# Altium PCB AgulhasCPU25.PCBDOC (part 1 of 10)
Units mm, origin at the board's own origin, x right, y up, seen from the top; angles counter-clockwise.
Board outline 179.96 x 114.94 mm, 2 copper layers (Top Layer, Top, Bottom Layer, Bottom), stack 1.341 mm thick; 247 components, 222 nets, 910 pads, 491 vias.
Unrouted connection lines stored in the file: 2.
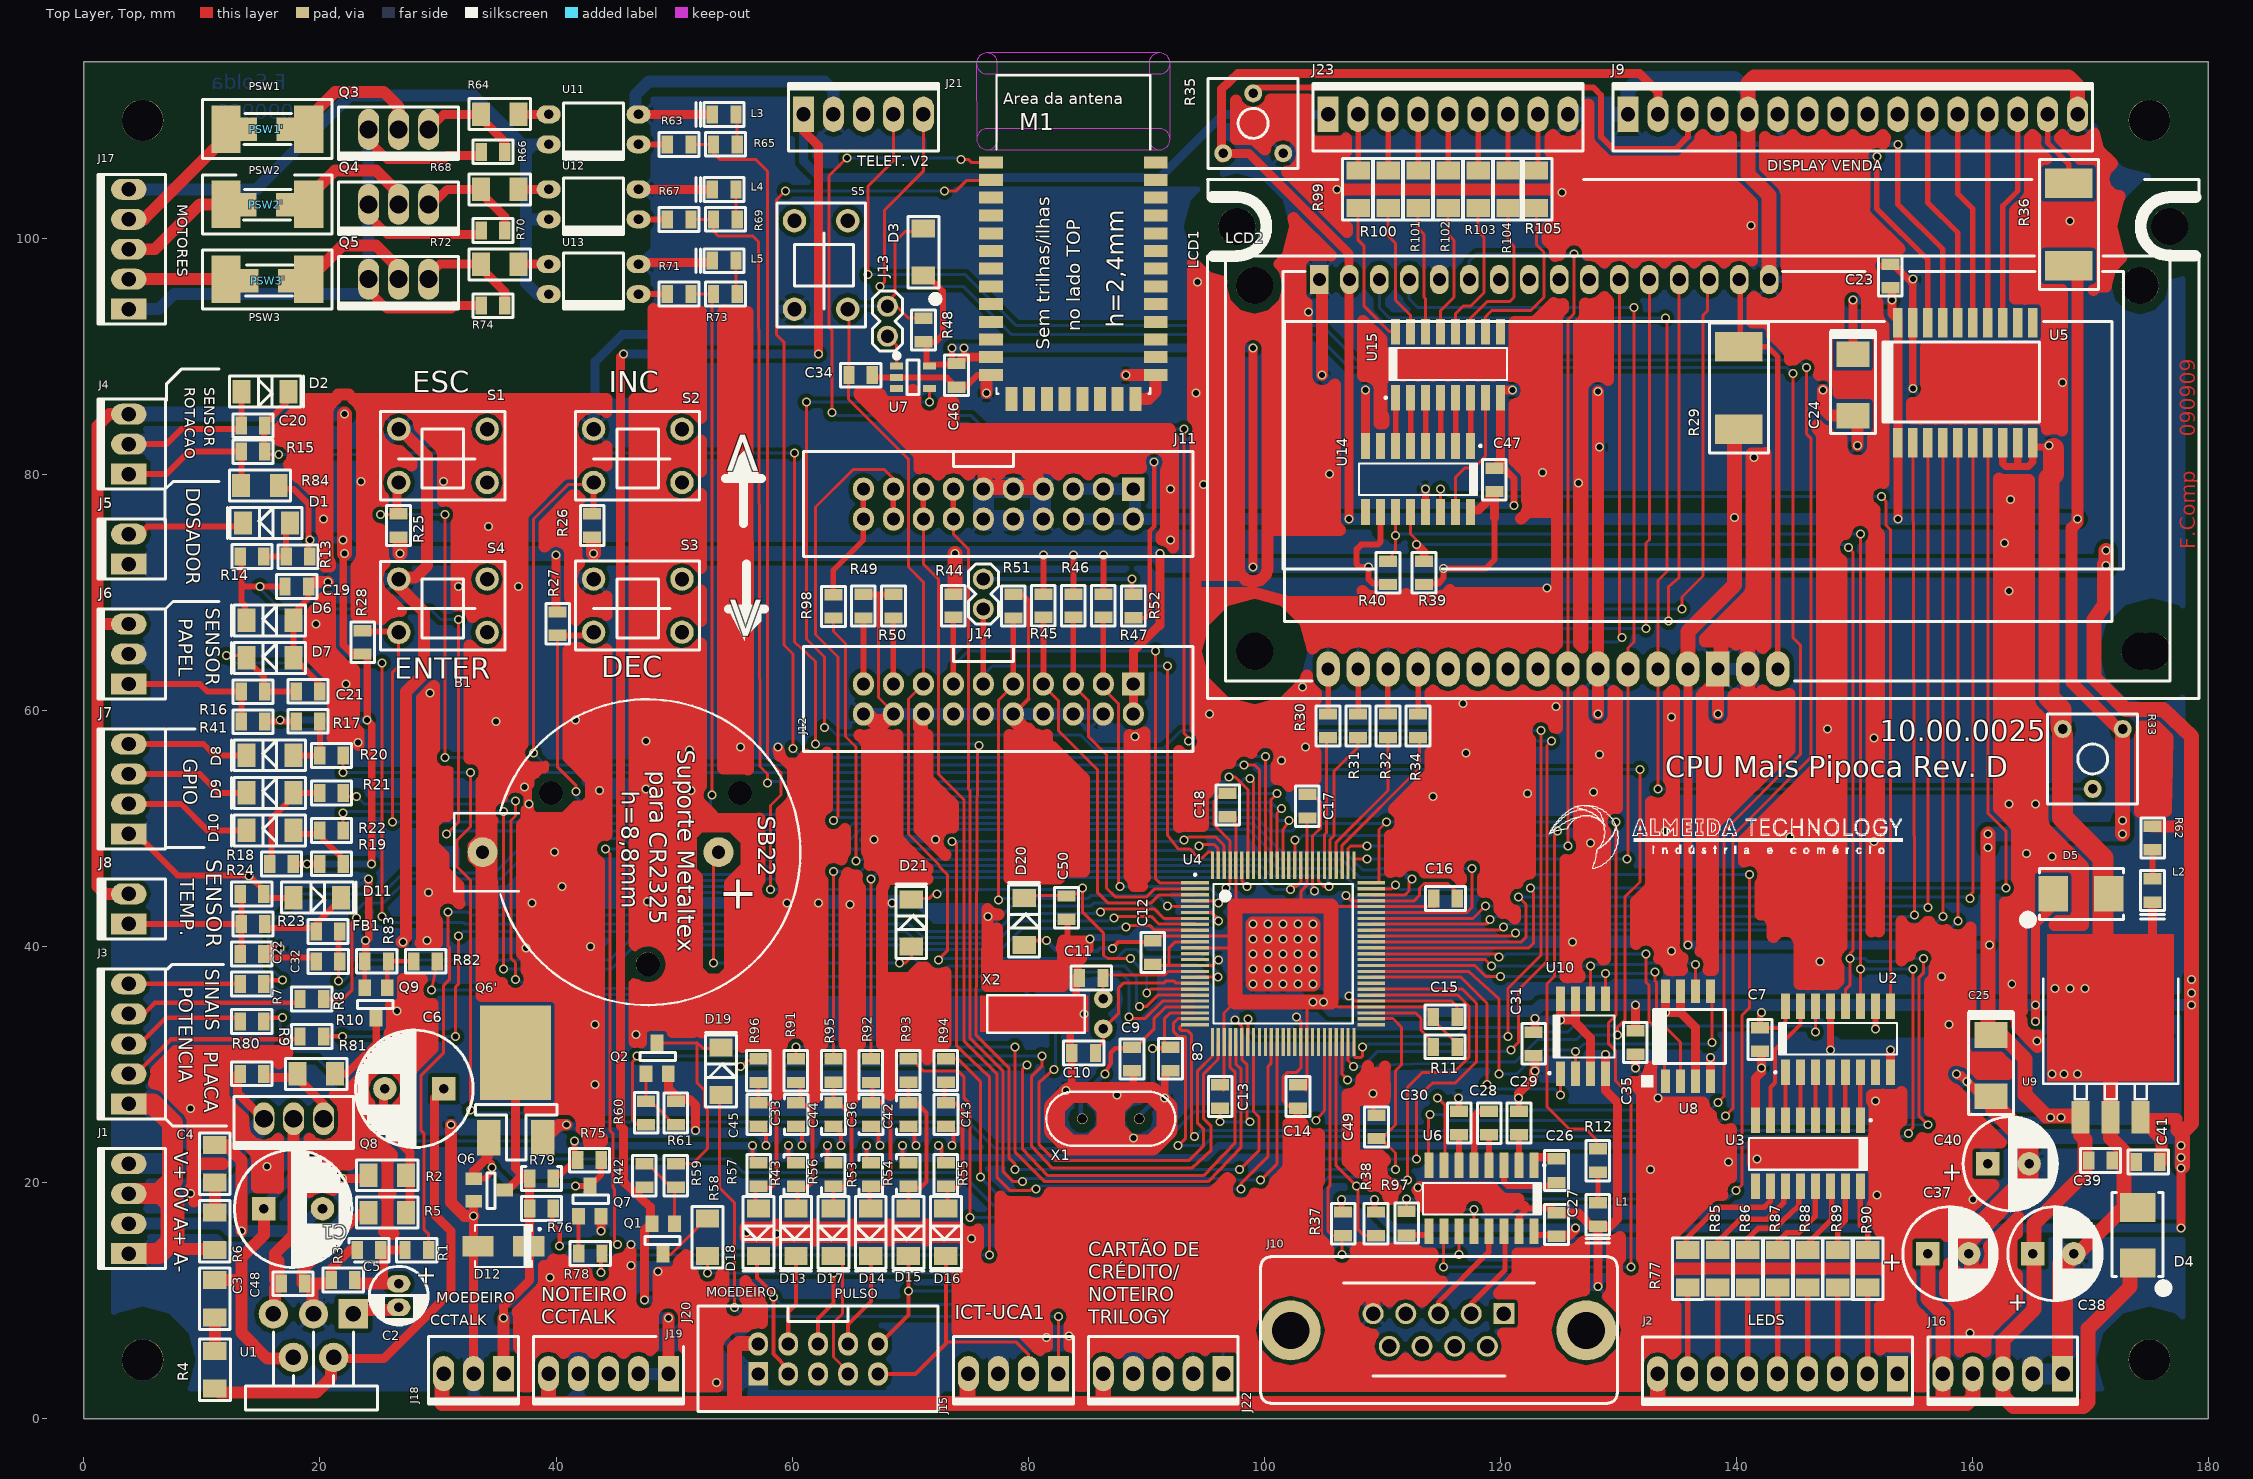
[diagram p0: Top Layer, Top view]
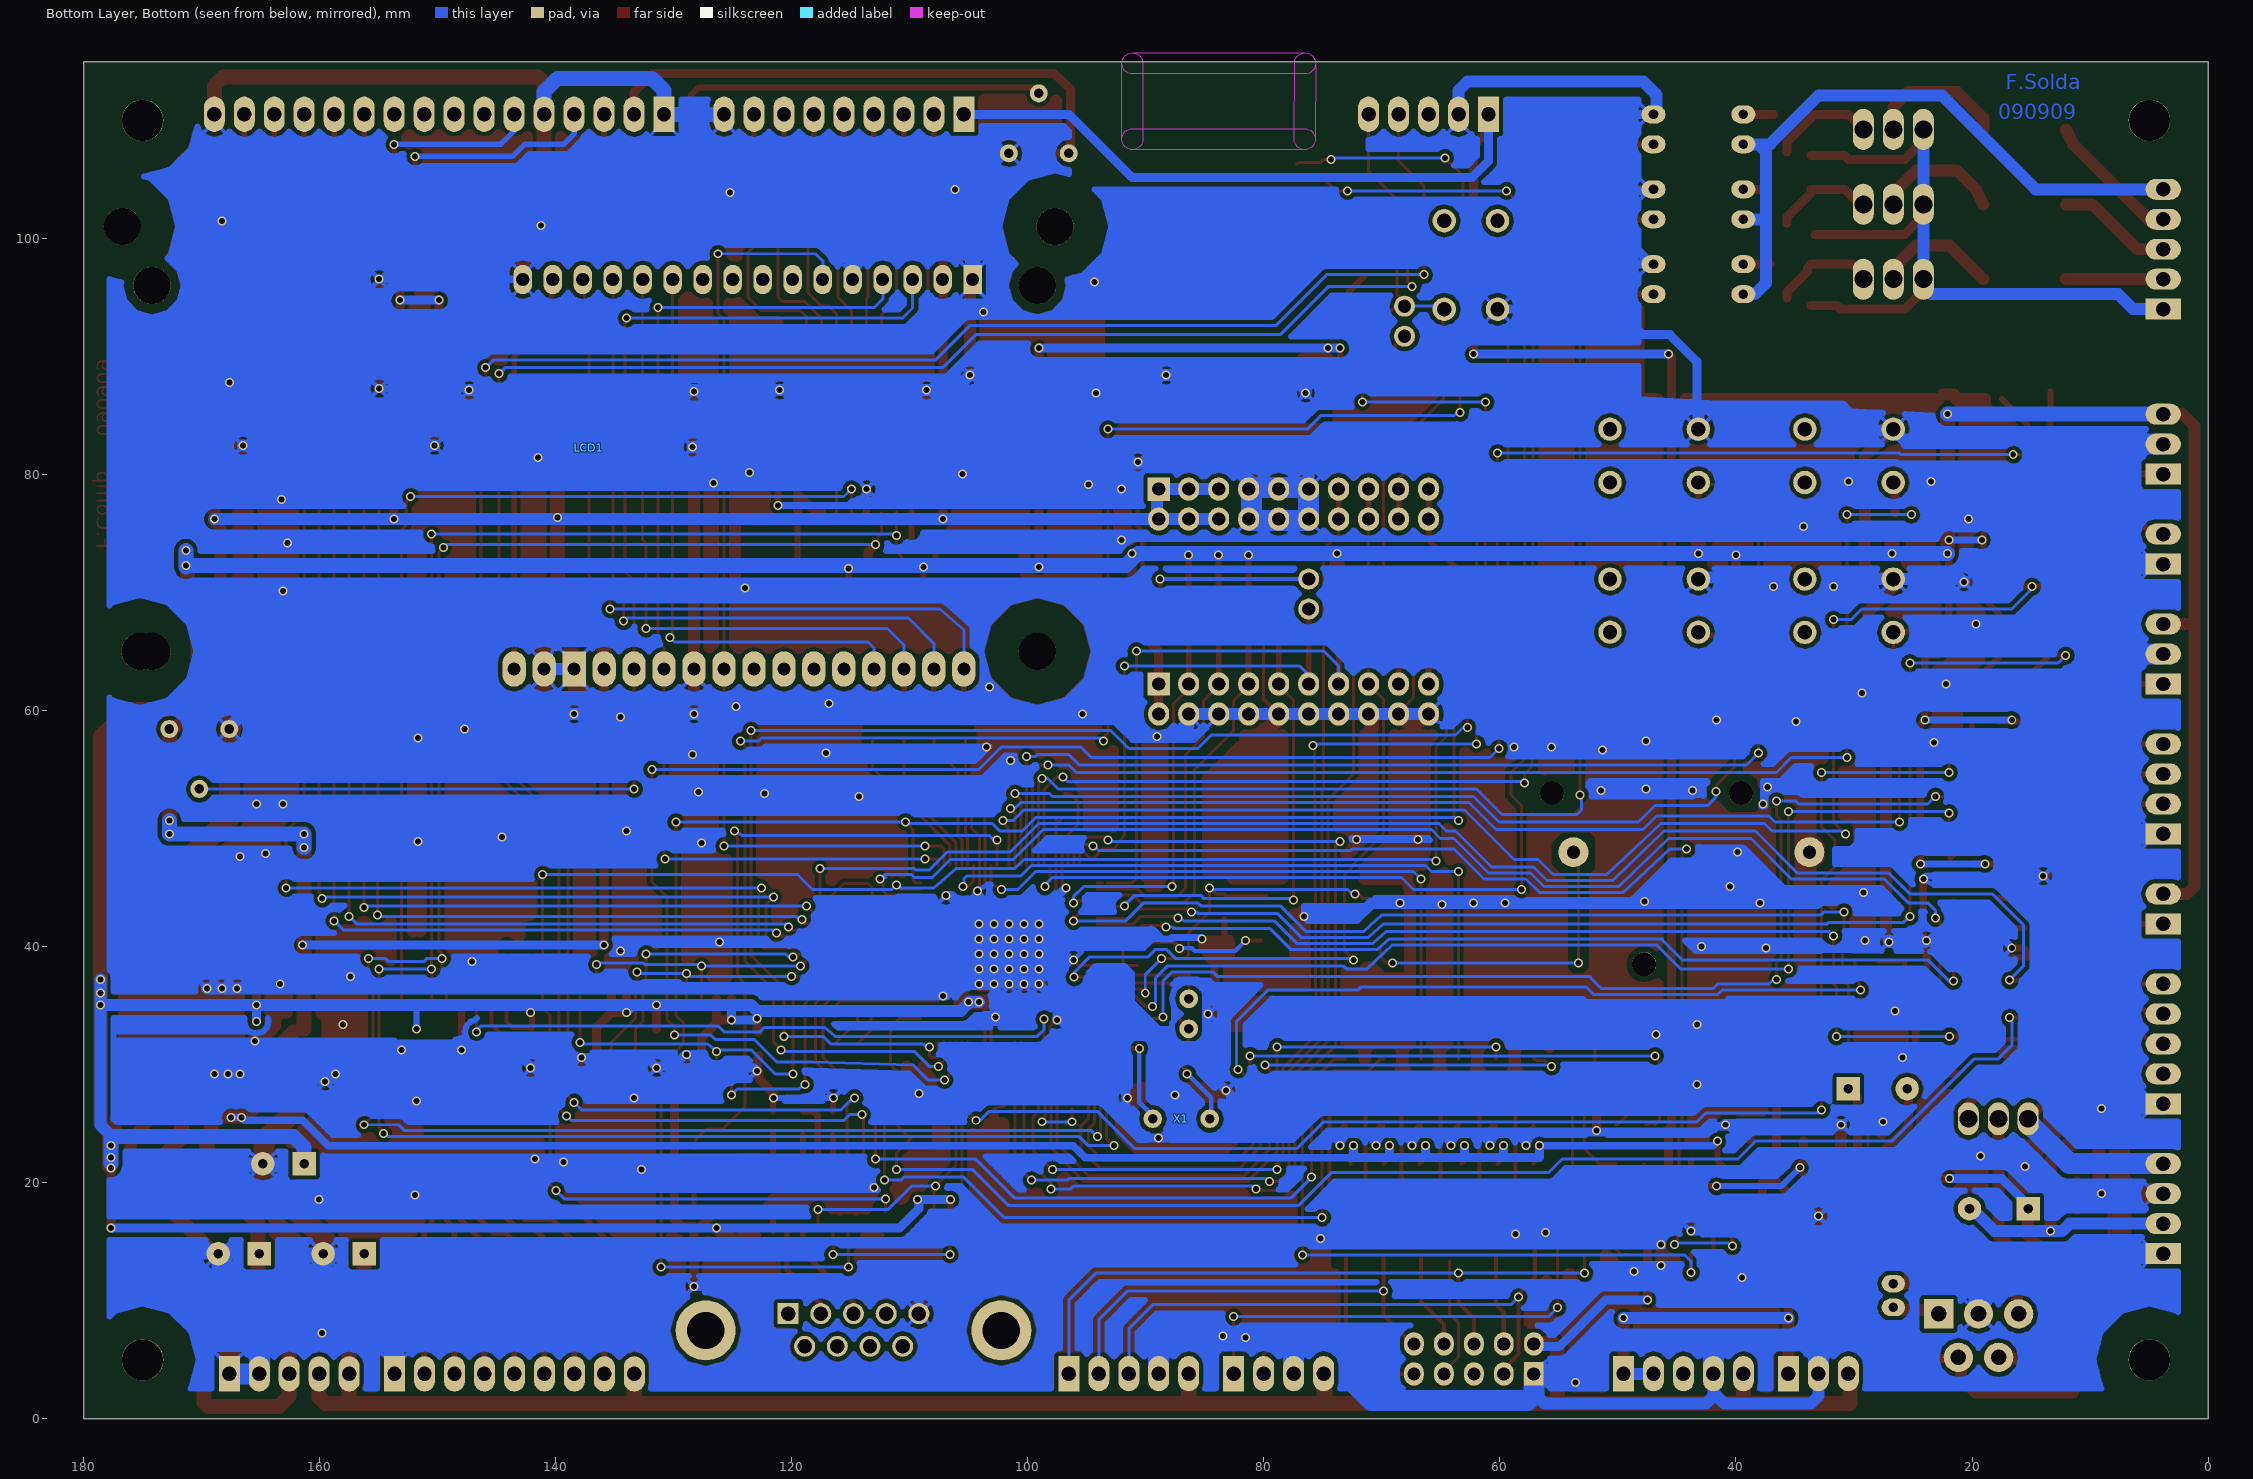
[diagram p1: Bottom Layer, Bottom view, seen from below]

## Layer stack, top to bottom
Top Solder, Top Mask: solder mask 0.0102, Solder Resist, Dk 3.5
Top Layer, Top: signal copper 0.0356
Dielectric1: dielectric 1.27, FR-4, Dk 4.8
Bottom Layer, Bottom: signal copper 0.0356
Bottom Solder, Bot Mask: solder mask 0.0102, Solder Resist, Dk 3.5

## Board outline
179.959,0 179.959,114.935 0,114.935 0,0

## Design rules (kind name [scope] priority, off if disabled: settings)
Clearance [All] p1: gap=0.178
PlaneClearance [All] p1: clearance=0.254
PolygonConnect [All] p1: connectstyle=Relief reliefconductorwidth=0.254 reliefentries=4 polygonreliefangle="90 Angle" airgapwidth=0.254
RoutingVias [All] p1: holewidth=0.711 width=1.27 viastyle="Through Hole" minholewidth=0.711 minwidth=1.27 maxholewidth=0.711 maxwidth=1.27
SilkToSolderMaskClearance SilkscreenOverComponentPads [IsPad] p1: minsilkscreentomaskgap=0.254 clearancetoexposedcopper=TRUE
SolderMaskExpansion [All] p1: expansion=0.102
UnpouredPolygon [All] p1: allowunpoured=FALSE
Width [All] p1: maxlimit=2.54 minlimit=0.254 preferedwidth=0.508
27 further rules are at their usual default settings.

## Classes and differential pairs
component class amplificadorAudio: C1 C2 C3 C4 C5 C6 C48 J1 Q8 Q9 R1 R2 R3 R4 R5 R6 R80 R81 R82 R83 U1
component class ControleLeds: C7 C47 J2 J23 R77 R85 R86 R87 R88 R89 R90 R99 R100 R101 R102 R103 R104 R105 U2 U3 U14 U15
component class ControlePotencia: C49 J3 R7 R8 R9 R10
component class CPU: B1 C8 C9 C10 C11 C12 C13 C14 C15 C16 C17 C18 C50 D20 D21 L1 R11 R12 R37 R38 R39 R40 U4 X1 X2
component class EntradaSensores: C19 C20 C21 D1 D2 D6 D7 D8 D9 D10 J4 J5 J6 J7 R13 R14 R15 R16 R17 R18 R19 R20 R21 R22 R41 R84
component class EntradaSensorTemperatura: C22 C32 D11 FB1 J8 R23 R24
component class IHM: C23 C24 C25 J9 LCD1 LCD2 R25 R26 R27 R28 R29 R30 R31 R32 R33 R34 R35 R36 S1 S2 S3 S4 U5
component class InterfaceConfiguracao: C26 C27 C28 C29 C30 J10 R97 U6
component class InterfaceGSM: C46 J11 J21 M1 R98
component class InterfacePagamentos: C33 C36 C42 C43 C44 C45 D12 D13 D14 D15 D16 D17 D18 D19 J15 J18 J19 J20 J22 Q1 Q2 Q6 Q6' Q7 R42 R43 R53 R54 R55 R56 R57 R58 R59 R60 R61 R75 R76 R78 R79 R91 R92 R93 R94 R95 R96
component class JTAG: C34 D3 J12 J13 J14 R44 R45 R46 R47 R48 R49 R50 R51 R52 S5 U7
component class Memoria: C31 C35 U8 U10
component class Regulador: C37 C38 C39 C40 C41 D4 D5 J16 L2 R62 U9
component class SaidasMotoresCC: J17 L3 L4 L5 PSW1 PSW1' PSW2 PSW2' PSW3 PSW3' Q3 Q4 Q5 R63 R64 R65 R66 R67 R68 R69 R70 R71 R72 R73 R74 U11 U12 U13

## Components (designator, comment, footprint, x,y, rotation, side; value= is the part's Value field where it differs from the comment)
B1 "" BAT_CR2325_SB22_BAT_CR2325_SB22(Primary) 47.752,47.981 r0 top
C1 "1000uF" "CAP 10X5"#1 15.24,17.78 r0 top
C2 "10uF/35V" "CAP POL 5X11MM" 26.67,11.43 r0 top
C3 "39nF/50V-1206" "1206-REVISADO O"#1 11.1,10.16 r0 top
C4 "100nF/50V-1206" "1206-REVISADO O"#1 11.1,21.59 r0 top
C5 "100nF/50V-0805" "0805-REVISADO O"#1 20.955,11.735 r0 top
C6 "470uF/50V" "CAP 10X5"#2 30.48,27.94 r0 top
C7 "100nF/50V-0805" "0805-REVISADO O"#2 141.986,31.115 r0 top
C8 "22pF/50V-0805" "0805-REVISADO O"#3 92.075,29.464 r0 top
C9 "22pF/50V-0805" "0805-REVISADO O"#2 88.773,29.464 r0 top
C10 "22pF/50V-0805" "0805-REVISADO O"#1 83.693,30.988 r0 top
C11 "22pF/50V-0805" "0805-REVISADO O"#1 84.328,37.338 r0 top
C12 "100nF/50V-0805" "0805-REVISADO O"#3 90.551,38.481 r0 top
C13 "100nF/50V-0805" "0805-REVISADO O"#2 96.266,26.289 r0 top
C14 "100nF/50V-0805" "0805-REVISADO O"#2 102.87,26.289 r0 top
C15 "100nF/50V-0805" "0805-REVISADO O"#4 116.332,34.036 r0 top
C16 "100nF/50V-0805" "0805-REVISADO O"#5 116.332,44.069 r0 top
C17 "100nF/50V-0805" "0805-REVISADO O"#6 103.657,52.883 r0 top
C18 "100nF/50V-0805" "0805-REVISADO O"#7 96.901,52.959 r0 top
C19 "100nF/50V-0805" "0805-REVISADO O"#4 19.05,70.485 r0 top
C20 "100nF/50V-0805" "0805-REVISADO O"#8 13.335,84.125 r0 top
C21 "100nF/50V-0805" "0805-REVISADO O"#5 19.99,61.595 r0 top
C22 "100nF/50V-0805" "0805-REVISADO O"#4 15.24,39.37 r0 top
C23 "100nF/50V-0805" "0805-REVISADO O"#7 153.035,97.79 r0 top
C24 "NAO_MONTAR" "CAP 2413 POLARI"#1 149.86,84.963 r0 top
C25 "NAO_MONTAR" "CAP 2413 POLARI"#2 161.544,27.305 r0 top
C26 "100nF/50V-0805" "0805-REVISADO O"#3 124.765,19.99 r0 top
C27 "100nF/50V-0805" "0805-REVISADO O"#6 124.765,17.45 r0 top
C28 "100nF/50V-0805" "0805-REVISADO O"#6 119.05,26.035 r0 top
C29 "100nF/50V-0805" "0805-REVISADO O"#7 121.59,26.035 r0 top
C30 "100nF/50V-0805" "0805-REVISADO O"#7 116.51,26.035 r0 top
C31 "100nF/50V-0805" "0805-REVISADO O"#3 122.809,30.734 r0 top
C32 "100nF/50V-0805" "0805-REVISADO O"#1 19.685,38.735 r0 top
C33 "100nF" "0805-REVISADO O"#2 60.325,24.765 r0 top
C34 "100nF/50V-0805" "0805-REVISADO O"#5 66.802,88.392 r0 top
C35 "100nF/50V-0805" "0805-REVISADO O"#2 131.445,30.861 r0 top
C36 "100nF" "0805-REVISADO O"#2 66.675,24.765 r0 top
C37 "100uF/35V" "CAP POL 8X12MM"#1 156.21,13.97 r0 top
C38 "100uF/35V" "CAP POL 8X12MM"#1 165.1,13.97 r0 top
C39 "100nF/50V-0805" "0805-REVISADO O"#5 171.831,21.844 r0 top
C40 "100uF/35V" "CAP POL 8X12MM"#2 161.29,21.59 r0 top
C41 "100nF/50V-0805" "0805-REVISADO O"#1 173.863,21.717 r0 top
C42 "100nF" "0805-REVISADO O"#2 69.85,24.765 r0 top
C43 "100nF" "0805-REVISADO O"#2 73.025,24.765 r0 top
C44 "100nF" "0805-REVISADO O"#3 63.5,24.765 r0 top
C45 "100nF" "0805-REVISADO O"#2 57.15,24.765 r0 top
C46 "100nF/50V-0805" "0805-REVISADO O"#3 73.914,87.376 r0 top
C47 "100nF/50V-0805" "0805-REVISADO O"#7 119.507,80.518 r0 top
C48 "100nF/50V-0805" "0805-REVISADO O"#4 18.72,11.43 r0 top
C49 "100nF/50V-0805" "0805-REVISADO O"#7 109.499,25.705 r0 top
C50 "100nF/50V-0805" "0805-REVISADO O"#2 83.261,42.291 r0 top
D1 "1N4148-SOD80" MINIMLEF/SOD80#1 17.45,75.87 r0 top
D2 "4V7-SOD80" MINIMLEF/SOD80#2 13.335,86.995 r0 top
D3 "1N4148-SOD80" MINIMLEF/SOD80#3 71.12,100.838 r0 top
D4 "SMBJ5.0A" SMB/DO214AA-REV#1 173.99,17.78 r0 top
D5 "SMBJ3.3A" SMB/DO214AA-REV#2 171.45,44.45 r0 top
D6 "4V7-SOD80" MINIMLEF/SOD80#1 17.78,67.615 r0 top
D7 "4V7-SOD80" MINIMLEF/SOD80#1 17.78,64.44 r0 top
D8 "1N4148-SOD80" MINIMLEF/SOD80#1 17.78,56.185 r0 top
D9 "1N4148-SOD80" MINIMLEF/SOD80#1 17.78,53.01 r0 top
D10 "1N4148-SOD80" MINIMLEF/SOD80#1 17.78,49.835 r0 top
D11 "4V7-SOD80" MINIMLEF/SOD80#2 17.78,44.12 r0 top
D12 "SMBJ5.0A" SMB/DO-214AA 35.56,14.605 r0 top
D13 "1N4148-SOD80" MINIMLEF/SOD80#3 60.325,17.78 r0 top
D14 "1N4148-SOD80" MINIMLEF/SOD80#3 66.675,17.78 r0 top
D15 "1N4148-SOD80" MINIMLEF/SOD80#3 69.85,17.78 r0 top
D16 "1N4148-SOD80" MINIMLEF/SOD80#3 73.025,17.78 r0 top
D17 "1N4148-SOD80" MINIMLEF/SOD80#3 63.5,17.78 r0 top
D18 "1N4148-SOD80" MINIMLEF/SOD80#3 57.15,17.78 r0 top
D19 "1N4148-SOD80" MINIMLEF/SOD80#4 53.975,27.432 r0 top
D20 "1N4148-SOD80" MINIMLEF/SOD80#4 79.654,40.132 r0 top
D21 "1N4148-SOD80" MINIMLEF/SOD80#4 70.104,40.005 r0 top
FB1 "FERRITE BEAD 1K-0805" "0805-REVISADO O"#8 19.685,41.275 r0 top
J1 "PCMC2-4" PCMC2-4#1 3.81,13.97 r0 top
J2 "PCMC2-9" PCMC2-9#1 153.645,3.785 r0 top
J3 "PCMC2-5" PCMC2-5#1 3.81,26.67 r0 top
J4 "PCMC2-3" PCMC2-3#1 3.81,80.01 r0 top
J5 "PCMC2-2" PCMC2-2 3.81,72.39 r0 top
J6 "PCMC2-3" PCMC2-3#1 3.81,62.23 r0 top
J7 "PCMC2-4" PCMC2-4#1 3.81,49.53 r0 top
J8 "PCMC2-2" PCMC2-2 3.81,41.91 r0 top
J9 "PCMC2-16" PCMC2-16 130.81,110.49 r0 top
J10 "DPBCF-09" "DB9-FÊMEA MONTA_DB9-FÊMEA_MONTAGEM_EM_PCI_180(Primary)" 109.22,8.89 r0 top
J11 "IDCSC-20" IDCSC-20 88.9,78.74 r0 top
J12 "IDCSC-20" IDCSC-20 88.9,62.23 r0 top
J13 "NM" JUMPER100 68.072,94.234 r0 top
J14 "BMO-02-2E" JUMPER100 76.2,71.12 r0 top
J15 "PCMC2-4" PCMC2-4#2 82.55,3.81 r0 top
J16 "PCMC2-5" PCMC2-5#2 167.64,3.785 r0 top
J17 "PCMC2-5" PCMC2-5#1 3.81,93.98 r0 top
J18 "PCMC2-3" PCMC2-3#2 35.56,3.81 r0 top
J19 "PCMC2-5" PCMC2-5#2 49.53,3.81 r0 top
J20 "IDCSC-10" IDCSC-10 62.205,5.055 r0 top
J21 "PCMC2-5" PCMC2-5#3 60.96,110.49 r0 top
J22 "PCMC2-5" PCMC2-5#2 96.52,3.81 r0 top
J23 "PCMC2-9" PCMC2-9#2 105.41,110.49 r0 top
L1 "LED VERDE 0805" "LED 0805 - REVI"#1 128.27,18.288 r0 top
L2 "LED VERMELHO 0805 CROMATEK" "LED 0805 - REVI"#2 175.26,45.72 r0 top
L3 "LED VERMELHO 0805 CROMATEK" "LED 0805 - REVI"#3 55.245,110.49 r0 top
L4 "LED VERMELHO 0805 CROMATEK" "LED 0805 - REVI"#3 55.245,104.14 r0 top
L5 "LED VERMELHO 0805 CROMATEK" "LED 0805 - REVI"#3 55.245,98.095 r0 top
LCD1 "NAO MONTAR" WH1602_WH1602(Primary) 138.43,63.5 r0 top
LCD2 "CHINÊS" "LCD CHINES_LCD_CHINES(Primary)" 99.187,64.999 r0 top
M1 "" HC-06_BLUETOOTH 83.82,100.33 r0 top
PSW1 "NANOSMDC020F-2" "2512 - REVISADO"#1 19.05,109.22 r0 top
PSW1' "" "1206-REVISADO O"#2 15.494,109.22 r0 top
PSW2 "NANOSMDC020F-2" "2512 - REVISADO"#1 19.05,102.87 r0 top
PSW2' "" "1206-REVISADO O"#2 15.469,102.819 r0 top
PSW3 "NANOSMDC020F-2" "2512 - REVISADO"#1 19.05,96.52 r0 top
PSW3' "" "1206-REVISADO O"#2 15.621,96.393 r0 top
Q1 "BC856" "SOT23 - REVISAD"#1 50.038,16.51 r0 top
Q2 "BC846" "SOT23 - REVISAD"#2 47.625,29.21 r0 top
Q3 "IRLZ44N-TO220" "TO220-3 EM PÉ"#1 29.21,109.22 r0 top
Q4 "IRLZ44N-TO220" "TO220-3 EM PÉ"#1 29.21,102.87 r0 top
Q5 "IRLZ44N-TO220" "TO220-3 EM PÉ"#1 29.21,96.52 r0 top
Q6 "BC846" "SOT23 - REVISAD"#3 33.02,20.32 r0 top
Q6' "MJD31" "DPAK REVISADO O" 34.29,23.8 r0 top
Q7 "BC846" "SOT23 - REVISAD"#4 41.91,17.145 r0 top
Q8 "IRF9540" "TO220-3 EM PÉ"#2 20.32,25.4 r0 top
Q9 "BC846" "SOT23 - REVISAD"#1 25.705,36.5 r0 top
R1 "0R-0805" "0805-REVISADO O"#4 29.21,14.275 r0 top
R2 "2K2-1206-5%" "1206-REVISADO O"#3 25.705,20.625 r0 top
R3 "100K-0805-5%" "0805-REVISADO O"#8 23.165,14.275 r0 top
R4 "2K2-1206-5%" "1206-REVISADO O"#4 11.1,4.115 r0 top
R5 "100R-1206-5%" "1206-REVISADO O"#5 25.705,17.45 r0 top
R6 "1K-1206-5%" "1206-REVISADO O"#6 11.1,15.875 r0 top
R7 "100R-0805-5%" "0805-REVISADO O"#4 15.24,36.83 r0 top
R8 "100R-0805-5%" "0805-REVISADO O"#4 20.32,35.56 r0 top
R9 "100R-0805-5%" "0805-REVISADO O"#4 15.24,33.655 r0 top
R10 "100R-0805-5%" "0805-REVISADO O"#4 20.32,32.385 r0 top
R11 "100nF/50V-0805" "0805-REVISADO O"#4 116.332,31.496 r0 top
R12 "1K-0805-5%" "0805-REVISADO O"#6 128.27,22.86 r0 top
R13 "10K-0805-5%" "0805-REVISADO O"#8 17.145,73.025 r0 top
R14 "1K-0805-5%" "0805-REVISADO O"#5 15.24,73.025 r0 top
R15 "10K-0805-5%" "0805-REVISADO O"#8 13.335,81.915 r0 top
R16 "100R-0805-5%" "0805-REVISADO O"#8 13.335,61.595 r0 top
R17 "10K-0805-5%" "0805-REVISADO O"#5 19.99,59.055 r0 top
R18 "10K-0805-5%" "0805-REVISADO O"#8 15.748,46.99 r0 top
R19 "10K-0805-5%" "0805-REVISADO O"#5 21.971,46.99 r0 top
R20 "1K-0805-5%" "0805-REVISADO O"#8 19.99,56.185 r0 top
R21 "1K-0805-5%" "0805-REVISADO O"#8 19.99,53.01 r0 top
R22 "1K-0805-5%" "0805-REVISADO O"#8 19.99,49.835 r0 top
R23 "100R-0805-5%" "0805-REVISADO O"#8 13.335,41.91 r0 top
R24 "500R-1%" "0805-REVISADO O"#4 15.24,44.45 r0 top
R25 "56K-0805-5%" "0805-REVISADO O"#2 26.67,74.676 r0 top
R26 "56K-0805-5%" "0805-REVISADO O"#2 43.053,74.676 r0 top
R27 "56K-0805-5%" "0805-REVISADO O"#7 40.132,68.326 r0 top
R28 "56K-0805-5%" "0805-REVISADO O"#2 23.622,64.77 r0 top
R29 "5R6-2512-5%" "2512 - REVISADO"#2 140.208,83.82 r0 top
R30 "100R-0805-5%" "0805-REVISADO O"#6 105.41,59.69 r0 top
R31 "100R-0805-5%" "0805-REVISADO O"#6 107.95,59.69 r0 top
R32 "100R-0805-5%" "0805-REVISADO O"#6 110.465,59.69 r0 top
R33 "TRIMPOT 10K-BOURNS 3386" "TRIMPOT 3386"#1 172.72,58.42 r0 top
R34 "100R-0805-5%" "0805-REVISADO O"#6 113.03,59.69 r0 top
R35 "TRIMPOT 10K-BOURNS 3386" "TRIMPOT 3386"#2 96.52,107.188 r0 top
R36 "5R6-2512-5%" "2512 - REVISADO"#3 168.148,104.648 r0 top
R37 "10K-0805-5%" "0805-REVISADO O"#3 106.68,15.494 r0 top
R38 "10K-0805-5%" "0805-REVISADO O"#3 109.474,15.494 r0 top
R39 "10K-0805-5%" "0805-REVISADO O"#7 113.538,72.644 r0 top
R40 "10K-0805-5%" "0805-REVISADO O"#7 110.49,72.644 r0 top
R41 "NM" "0805-REVISADO O"#8 13.335,59.055 r0 top
R42 "10K-0805-5%" "0805-REVISADO O"#6 47.498,21.59 r0 top
R43 "10K-0805" "0805-REVISADO O"#2 60.325,19.685 r0 top
R44 "10K-0805-5%" "0805-REVISADO O"#7 73.66,69.85 r0 top
R45 "10K-0805-5%" "0805-REVISADO O"#7 81.28,69.85 r0 top
R46 "10K-0805-5%" "0805-REVISADO O"#7 83.82,69.85 r0 top
R47 "10K-0805-5%" "0805-REVISADO O"#7 86.36,69.85 r0 top
R48 "10K-0805-5%" "0805-REVISADO O"#7 71.12,93.218 r0 top
R49 "10K-0805-5%" "0805-REVISADO O"#3 66.04,67.818 r0 top
R50 "10K-0805-5%" "0805-REVISADO O"#3 68.58,67.818 r0 top
R51 "10K-0805-5%" "0805-REVISADO O"#3 78.74,67.818 r0 top
R52 "10K-0805-5%" "0805-REVISADO O"#6 88.9,69.85 r0 top
R53 "10K-0805" "0805-REVISADO O"#2 66.675,19.685 r0 top
R54 "10K-0805" "0805-REVISADO O"#2 69.85,19.685 r0 top
R55 "10K-0805" "0805-REVISADO O"#2 73.025,19.685 r0 top
R56 "10K-0805" "0805-REVISADO O"#2 63.5,19.685 r0 top
R57 "10K-0805" "0805-REVISADO O"#2 57.15,19.685 r0 top
R58 "10R-0805" "1206-REVISADO O"#6 52.832,15.367 r0 top
R59 "2K2-0805-5%" "0805-REVISADO O"#6 50.165,21.59 r0 top
R60 "10K-0805-5%" "0805-REVISADO O"#3 47.625,24.892 r0 top
R61 "10K-0805-5%" "0805-REVISADO O"#2 50.165,24.892 r0 top
R62 "330R-0805-5%" "0805-REVISADO O"#7 175.26,50.165 r0 top
R63 "100R-0805-5%" "0805-REVISADO O"#4 51.435,107.95 r0 top
R64 "2K2-1206-5%" "1206-REVISADO O"#2 35.23,110.49 r0 top
R65 "100R-0805-5%" "0805-REVISADO O"#1 53.34,107.95 r0 top
R66 "100K-0805-5%" "0805-REVISADO O"#1 33.655,107.315 r0 top
R67 "100R-0805-5%" "0805-REVISADO O"#4 51.435,101.6 r0 top
R68 "2K2-1206-5%" "1206-REVISADO O"#2 35.23,104.14 r0 top
R69 "100R-0805-5%" "0805-REVISADO O"#1 53.34,101.6 r0 top
R70 "100K-0805-5%" "0805-REVISADO O"#1 33.655,100.635 r0 top
R71 "100R-0805-5%" "0805-REVISADO O"#4 51.435,95.25 r0 top
R72 "2K2-1206-5%" "1206-REVISADO O"#2 35.23,97.79 r0 top
R73 "100R-0805-5%" "0805-REVISADO O"#1 53.34,95.25 r0 top
R74 "100K-0805-5%" "0805-REVISADO O"#1 33.655,94.285 r0 top
R75 "22K-0805-5%" "0805-REVISADO O"#5 43.815,21.895 r0 top
R76 "10K-0805-5%" "0805-REVISADO O"#8 37.77,17.78 r0 top
R77 "10R-1206-5%" "1206-REVISADO O"#6 135.89,12.7 r0 top
R78 "10K-0805-5%" "0805-REVISADO O"#8 41.91,13.97 r0 top
R79 "22K-0805-5%" "0805-REVISADO O"#8 37.77,20.32 r0 top
R80 "100K-0805-5%" "0805-REVISADO O"#4 15.24,29.21 r0 top
R81 "4K7-1206-5%" "1206-REVISADO O"#5 19.685,29.21 r0 top
R82 "10K-0805-5%" "0805-REVISADO O"#1 27.94,38.735 r0 top
R83 "10K-0805-5%" "0805-REVISADO O"#1 23.8,38.735 r0 top
R84 "1K-1206-5%" "1206-REVISADO O"#7 14.91,79.045 r0 top
R85 "10R-1206-5%" "1206-REVISADO O"#4 138.43,12.7 r0 top
R86 "10R-1206-5%" "1206-REVISADO O"#4 140.97,12.7 r0 top
R87 "10R-1206-5%" "1206-REVISADO O"#4 143.51,12.7 r0 top
R88 "10R-1206-5%" "1206-REVISADO O"#4 146.05,12.7 r0 top
R89 "10R-1206-5%" "1206-REVISADO O"#4 148.59,12.7 r0 top
R90 "10R-1206-5%" "1206-REVISADO O"#6 151.13,12.7 r0 top
R91 "10K-0805" "0805-REVISADO O"#6 60.325,30.48 r0 top
R92 "10K-0805" "0805-REVISADO O"#6 66.675,30.48 r0 top
R93 "10K-0805" "0805-REVISADO O"#7 69.85,30.48 r0 top
R94 "10K-0805" "0805-REVISADO O"#7 73.025,30.48 r0 top
R95 "10K-0805" "0805-REVISADO O"#7 63.5,30.48 r0 top
R96 "10K-0805" "0805-REVISADO O"#6 57.15,30.48 r0 top
R97 "10R-0805-5%" "0805-REVISADO O"#3 112.065,15.545 r0 top
R98 "10R-0805-5%" "0805-REVISADO O"#2 63.5,67.818 r0 top
R99 "10R-1206-5%" "1206-REVISADO O"#1 107.95,104.14 r0 top
R100 "10R-1206-5%" "1206-REVISADO O"#1 110.49,104.14 r0 top
R101 "10R-1206-5%" "1206-REVISADO O"#1 113.03,104.14 r0 top
R102 "10R-1206-5%" "1206-REVISADO O"#1 115.57,104.14 r0 top
R103 "10R-1206-5%" "1206-REVISADO O"#1 118.11,104.14 r0 top
R104 "10R-1206-5%" "1206-REVISADO O"#1 120.65,104.14 r0 top
R105 "10R-1206-5%" "1206-REVISADO O"#1 123.063,104.14 r0 top
S1 "A06-L12" "CHAVE TACTIL NO_[125](Primary)"#1 26.67,83.82 r0 top
S2 "A06-L12" "CHAVE TACTIL NO_[125](Primary)"#1 43.18,83.82 r0 top
S3 "A06-L12" "CHAVE TACTIL NO_[125](Primary)"#2 43.18,71.12 r0 top
S4 "A06-L12" "CHAVE TACTIL NO_[125](Primary)"#1 26.67,71.12 r0 top
S5 "A06-L12" "CHAVE TACTIL NO_[125](Primary)"#3 60.198,93.98 r0 top
U1 "TDA2003" "PENTAWATT V" 22.835,8.865 r0 top
U2 "74HC595D" "SOIC 16 PINOS"#1 148.59,31.75 r0 top
U3 "ULN2003-SMD" "SOIC 16 PINOS"#2 146.05,22.86 r0 top
U4 "LPC1768FBD100" "LQFP-100 PASTA" 94.132,45.39 r0 top
U5 "74HC245D" "SOIC 20 FEITO A" 153.67,82.677 r0 top
U6 "MAX3232CSE" "SOIC 16 PINOS"#2 118.415,19.05 r0 top
U7 "NM" SOT23-5 68.834,89.154 r0 top
U8 "SST25VF032B" "SOIC LARGO ATME" 133.985,28.575 r0 top
U9 "" TO-263_3 171.704,25.527 r0 top
U10 "FM25C160B" SOIC-08 125.095,29.21 r0 top
U11 "PC817" DIP-4 46.99,107.95 r0 top
U12 "PC817" DIP-4 46.99,101.6 r0 top
U13 "PC817" DIP-4 46.99,95.25 r0 top
U14 "74HC595D" "SOIC 16 PINOS"#3 113.03,80.01 r0 top
U15 "ULN2003-SMD" "SOIC 16 PINOS"#1 115.57,88.9 r0 top
X1 "" XTALV' 86.995,25.4 r0 top
X2 "" XTAL_32768' 86.36,34.29 r0 top

## Footprints (in the part's own frame and the unit in brackets; to place one, negate y for a bottom-side part, rotate by r counter-clockwise, add the part's x,y. Pads: shape width x height; smd on the part's side, far side on the other; paste and mask are expansions set on the pad)
"0805-REVISADO O"#1 [mil]
  rect 38x60 smd: 1(0,0) 2(79,0)
  silkscreen extent -27,-39 107,40
"0805-REVISADO O"#2 [mil]
  rect 60x38 smd: 1(0,0) 2(0,78)
  silkscreen extent -39,-28 40,106
"0805-REVISADO O"#3 [mil]
  rect 60x38 smd: 1(0,0) 2(0,79)
  silkscreen extent -40,-27 39,107
"0805-REVISADO O"#4 [mil]
  rect 38x60 smd: 1(0,0) 2(-79,0)
  silkscreen extent -107,-39 27,40
"0805-REVISADO O"#5 [mil]
  rect 38x60 smd: 1(0,0) 2(-78,0)
  silkscreen extent -106,-40 28,39
"0805-REVISADO O"#6 [mil]
  rect 60x38 smd: 1(0,0) 2(0,-79)
  silkscreen extent -40,-107 39,27
"0805-REVISADO O"#7 [mil]
  rect 60x38 smd: 1(0,0) 2(0,-78)
  silkscreen extent -39,-106 40,28
"0805-REVISADO O"#8 [mil]
  rect 38x60 smd: 1(0,0) 2(78,0)
  silkscreen extent -28,-40 106,39
"1206-REVISADO O"#1 [mil]
  rect 78x60 smd: 1(0,-63) 2(0,62)
  silkscreen extent -52,-103 51,102
"1206-REVISADO O"#2 [mil]
  rect 60x78 smd: 1(-63,0) 2(62,0)
  silkscreen extent -76,-51 82,52
"1206-REVISADO O"#3 [mil]
  rect 60x78 smd: 1(-62,0) 2(63,0)
  silkscreen extent -102,-52 103,51
"1206-REVISADO O"#4 [mil]
  rect 78x60 smd: 1(0,63) 2(0,-62)
  silkscreen extent -51,-102 52,103
"1206-REVISADO O"#5 [mil]
  rect 60x78 smd: 1(63,0) 2(-62,0)
  silkscreen extent -102,-51 103,52
"1206-REVISADO O"#6 [mil]
  rect 78x60 smd: 1(0,62) 2(0,-63)
  silkscreen extent -52,-103 51,102
"1206-REVISADO O"#7 [mil]
  rect 60x78 smd: 1(-63,0) 2(63,0)
  silkscreen extent -102,-51 103,52
"2512 - REVISADO"#1 [mil]
  rect 98x158 smd: 1(0,0) 2(-276,0)
  silkscreen extent -355,-98 78,99
"2512 - REVISADO"#2 [mil]
  rect 158x98 smd: 1(0,0) 2(0,275)
  silkscreen extent -98,-79 99,354
"2512 - REVISADO"#3 [mil]
  rect 158x98 smd: 1(0,0) 2(0,-275)
  silkscreen extent -98,-354 99,79
BAT_CR2325_SB22_BAT_CR2325_SB22(Primary) [mil]
  round 100 hole 44: 1(237,0) 2(-550,0)
  round 80 hole 80: Dummy1(308,197) Dummy2(-322,197) Dummy3(1,-374)
  silkscreen extent -645,-510 510,510
"CAP 10X5"#1 [mil]
  rect 78x78 hole 32: 1(0,0)
  round 78 hole 32: 2(196,0)
  silkscreen extent -98,-196 294,196
"CAP 10X5"#2 [mil]
  rect 78x78 hole 32: 1(0,0)
  round 78 hole 32: 2(-196,0)
  silkscreen extent -294,-196 98,196
"CAP 2413 POLARI"#1 [mil]
  rect 110x86 smd: 1(0,205) 2(0,0)
  silkscreen extent -75,-60 75,288
"CAP 2413 POLARI"#2 [mil]
  rect 110x86 smd: 1(0,204) 2(0,0)
  silkscreen extent -75,-60 75,287
"CAP POL 5X11MM" [mil]
  oval 78x58 hole 32: 1(0,0) 2(0,-79)
  silkscreen extent -98,-138 98,58
"CAP POL 8X12MM"#1 [mil]
  rect 78x78 hole 32: 1(0,0)
  round 78 hole 32: 2(137,0)
  silkscreen extent -83,-157 231,157
"CAP POL 8X12MM"#2 [mil]
  rect 78x78 hole 32: 1(0,0)
  round 78 hole 32: 2(138,0)
  silkscreen extent -82,-157 232,157
"CHAVE TACTIL NO_[125](Primary)"#1 [mil]
  round 78 hole 48: 1(0,0) 2(0,-178) _1(295,0) A2(295,-178)
  silkscreen extent -60,-237 354,59
"CHAVE TACTIL NO_[125](Primary)"#2 [mil]
  round 78 hole 48: 1(0,0) 2(0,-177) _1(295,0) A2(295,-177)
  silkscreen extent -60,-236 354,60
"CHAVE TACTIL NO_[125](Primary)"#3 [mil]
  round 78 hole 48: 1(0,0) 2(178,0) _1(0,295) A2(178,295)
  silkscreen extent -59,-60 237,354
"DB9-FÊMEA MONTA_DB9-FÊMEA_MONTAGEM_EM_PCI_180(Primary)" [mil]
  rect 70x70 hole 48: 1(436,0)
  round 70 hole 48: 2(327,0) 3(218,0) 4(109,0) 5(0,0) 6(381,-109) 7(272,-109) 8(163,-109) 9(54,-109)
  round 200 hole 124: _1(-275,-56) A2(711,-56)
  silkscreen extent -375,-299 815,190
DIP-4 [mil]
  oval 80x60 hole 32: 1(0,0) 2(0,100) 3(-300,100) 4(-300,0)
  silkscreen extent -250,-50 -50,137
"DPAK REVISADO O" [mil]
  rect 78x118 smd: 1(0,0) 3(181,0)
  rect 236x314 smd: 2(90,283)
  silkscreen extent -44,-74 228,111
HC-06_BLUETOOTH [mil]
  rect 80x40 smd: 1(-274,240) 2(-274,181) 3(-274,122) 4(-274,62) 5(-274,3) 6(-274,-56) 7(-274,-115) 8(-274,-174) 9(-274,-233) 10(-274,-292) 11(-274,-351) 12(-274,-410) 13(-274,-469) 22(275,-469) 23(275,-410) 24(275,-351) 25(275,-292) 26(275,-233) 27(275,-174) 28(275,-115) 29(275,-56) 30(275,3) 31(275,62) 32(275,122) 33(275,181) 34(275,240)
  rect 40x80 smd: 14(-206,-549) 15(-147,-549) 16(-88,-549) 17(-29,-549) 18(30,-549) 19(89,-549) 20(148,-549) 21(207,-549)
  Multi-Layer keep-out region: -253,570.14 -253.7,576.96 -255.72,583.52 -258.98,589.56 -263.35,594.85 -268.67,599.18 -274.73,602.39 -281.31,604.35 -288.14,605 -294.96,604.3 -301.52,602.28 -307.56,599.02 -312.85,594.65 -317.18,589.33 -320.39,583.27 -322.35,576.69 -323,569.86 -322,316.86 -321.3,310.04 -319.28,303.48 -316.02,297.44 -311.65,292.15 -306.33,287.82 -300.27,284.61 -293.69,282.65 -286.86,282 -280.04,282.7 -273.48,284.72 -267.44,287.98 -262.15,292.35 -257.82,297.67 -254.61,303.73 -252.65,310.31 -252,317.14
  Multi-Layer keep-out region: -288,605 -294.83,604.33 -301.39,602.34 -307.44,599.1 -312.75,594.75 -317.1,589.44 -320.34,583.39 -322.33,576.83 -323,570 -322.33,563.17 -320.34,556.61 -317.1,550.56 -312.75,545.25 -307.44,540.9 -301.39,537.66 -294.83,535.67 -288,535 288,535 294.83,535.67 301.39,537.66 307.44,540.9 312.75,545.25 317.1,550.56 320.34,556.61 322.33,563.17 323,570 322.33,576.83 320.34,583.39 317.1,589.44 312.75,594.75 307.44,599.1 301.39,602.34 294.83,604.33 288,605
  Multi-Layer keep-out region: 253,317 253.67,310.17 255.66,303.61 258.9,297.56 263.25,292.25 268.56,287.9 274.61,284.66 281.17,282.67 288,282 294.83,282.67 301.39,284.66 307.44,287.9 312.75,292.25 317.1,297.56 320.34,303.61 322.33,310.17 323,317 323,570 322.33,576.83 320.34,583.39 317.1,589.44 312.75,594.75 307.44,599.1 301.39,602.34 294.83,604.33 288,605 281.17,604.33 274.61,602.34 268.56,599.1 263.25,594.75 258.9,589.44 255.66,583.39 253.67,576.83 253,570
  Multi-Layer keep-out region: -287,352 -293.83,351.33 -300.39,349.34 -306.44,346.1 -311.75,341.75 -316.1,336.44 -319.34,330.39 -321.33,323.83 -322,317 -321.33,310.17 -319.34,303.61 -316.1,297.56 -311.75,292.25 -306.44,287.9 -300.39,284.66 -293.83,282.67 -287,282 288,282 294.83,282.67 301.39,284.66 307.44,287.9 312.75,292.25 317.1,297.56 320.34,303.61 322.33,310.17 323,317 322.33,323.83 320.34,330.39 317.1,336.44 312.75,341.75 307.44,346.1 301.39,349.34 294.83,351.33 288,352
  silkscreen extent -256,-532 257,531
IDCSC-10 [mil]
  rect 66x78 hole 44: 1(-200,-50)
  oval 66x78 hole 44: 2(-200,50) 3(-100,-50) 4(-100,50) 5(0,-50) 6(0,50) 7(100,-50) 8(100,50) 9(200,-50) 10(200,50)
  silkscreen extent -400,-175 400,176
IDCSC-20 [mil]
  rect 74x78 hole 44: 1(0,0)
  oval 70x78 hole 44: 2(0,-100) 3(-100,0) 4(-100,-100) 5(-200,0) 6(-200,-100) 7(-300,0) 8(-300,-100) 9(-400,0) 10(-400,-100) 11(-500,0) 12(-500,-100) 13(-600,0) 14(-600,-100) 15(-700,0) 16(-700,-100) 17(-800,0) 18(-800,-100) 19(-900,0) 20(-900,-100)
  silkscreen extent -1100,-225 200,125
JUMPER100 [mil]
  round 70 hole 44: 1(0,0) 2(0,-100)
  silkscreen extent -50,-150 50,50
"LCD CHINES_LCD_CHINES(Primary)" [mil]
  rect 62x98 hole 44: 1(216,1240)
  oval 62x98 hole 44: 2(316,1240) 3(416,1240) 4(516,1240) 5(616,1240) 6(716,1240) 7(816,1240) 8(916,1240) 9(1016,1240) 10(1116,1240) 11(1216,1240) 12(1316,1240) 13(1416,1240) 14(1516,1240) 15(1616,1240) 16(1716,1240)
  round 124 hole 124: _1(0,1220) _2(2953,0) _3(2953,1220) A4(0,0)
  silkscreen extent -98,-99 3052,1318
"LED 0805 - REVI"#1 [mil]
  rect 60x38 smd: 1(0,0) 2(0,-79)
  silkscreen extent -40,-134 39,27
"LED 0805 - REVI"#2 [mil]
  rect 60x38 smd: 1(0,0) 2(0,-78)
  silkscreen extent -40,-133 39,28
"LED 0805 - REVI"#3 [mil]
  rect 38x60 smd: 1(0,0) 2(-79,0)
  silkscreen extent -134,-40 27,39
"LQFP-100 PASTA" [mil]
  rect 92x11 smd: 1(0,0) 2(0,-20) 3(0,-40) 4(0,-60) 5(0,-79) 6(0,-99) 7(0,-119) 8(0,-138) 9(0,-158) 10(0,-178) 11(0,-197) 12(0,-217) 13(0,-237) 14(0,-256) 15(0,-276) 16(0,-296) 17(0,-315) 18(0,-335) 19(0,-355) 20(0,-375) 21(0,-394) 22(0,-414) 23(0,-434) 24(0,-453) 25(0,-473) 51(588,-473) 52(588,-453) 53(588,-434) 54(588,-414) 55(588,-394) 56(588,-375) 57(588,-355) 58(588,-335) 59(588,-315) 60(588,-296) 61(588,-276) 62(588,-256) 63(588,-237) 64(588,-217) 65(588,-197) 66(588,-178) 67(588,-158) 68(588,-138) 69(588,-119) 70(588,-99) 71(588,-79) 72(588,-60) 73(588,-40) 74(588,-20) 75(588,0)
  rect 11x92 smd: 26(58,-531) 27(77,-531) 28(97,-531) 29(117,-531) 30(136,-531) 31(156,-531) 32(176,-531) 33(195,-531) 34(215,-531) 35(235,-531) 36(254,-531) 37(274,-531) 38(294,-531) 39(313,-531) 40(333,-531) 41(353,-531) 42(373,-531) 43(392,-531) 44(412,-531) 45(432,-531) 46(451,-531) 47(471,-531) 48(491,-531) 49(510,-531) 50(530,-531) 76(530,58) 77(510,58) 78(491,58) 79(471,58) 80(451,58) 81(432,58) 82(412,58) 83(392,58) 84(373,58) 85(353,58) 86(333,58) 87(313,58) 88(294,58) 89(274,58) 90(254,58) 91(235,58) 92(215,58) 93(195,58) 94(176,58) 95(156,58) 96(136,58) 97(117,58) 98(97,58) 99(77,58) 100(58,58)
  silkscreen extent -4,-469 526,31
MINIMLEF/SOD80#1 [mil]
  rect 60x78 smd: 1(0,0) 2(-157,0)
  silkscreen extent -208,-52 40,51
MINIMLEF/SOD80#2 [mil]
  rect 60x78 smd: 1(0,0) 2(157,0)
  silkscreen extent -40,-51 208,52
MINIMLEF/SOD80#3 [mil]
  rect 78x60 smd: 1(0,0) 2(0,-157)
  silkscreen extent -51,-255 59,40
MINIMLEF/SOD80#4 [mil]
  rect 78x60 smd: 1(0,0) 2(0,157)
  silkscreen extent -52,-40 51,208
PCMC2-2 [mil]
  rect 118x70 hole 48: 1(0,0)
  oval 118x70 hole 48: 2(0,100)
  silkscreen extent -103,-50 122,150
PCMC2-3#1 [mil]
  rect 118x70 hole 48: 1(0,0)
  oval 118x70 hole 48: 2(0,100) 3(0,200)
  silkscreen extent -103,-50 122,250
PCMC2-3#2 [mil]
  rect 70x118 hole 48: 1(0,0)
  oval 70x118 hole 48: 2(-100,0) 3(-200,0)
  silkscreen extent -250,-102 50,123
PCMC2-4#1 [mil]
  rect 118x70 hole 48: 1(0,0)
  oval 118x70 hole 48: 2(0,100) 3(0,200) 4(0,300)
  silkscreen extent -102,-50 122,350
PCMC2-4#2 [mil]
  rect 70x118 hole 48: 1(0,0)
  oval 70x118 hole 48: 2(-100,0) 3(-200,0) 4(-300,0)
  silkscreen extent -350,-102 50,123
PCMC2-5#1 [mil]
  rect 118x70 hole 48: 1(0,0)
  oval 118x70 hole 48: 2(0,100) 3(0,200) 4(0,300) 5(0,400)
  silkscreen extent -103,-50 122,450
PCMC2-5#2 [mil]
  rect 70x118 hole 48: 1(0,0)
  oval 70x118 hole 48: 2(-100,0) 3(-200,0) 4(-300,0) 5(-400,0)
  silkscreen extent -451,-102 50,123
PCMC2-5#3 [mil]
  rect 70x118 hole 48: 1(0,0)
  oval 70x118 hole 48: 2(100,0) 3(200,0) 4(300,0) 5(400,0)
  silkscreen extent -50,-122 450,103
PCMC2-9#1 [mil]
  rect 70x118 hole 48: 1(0,0)
  oval 70x118 hole 48: 2(-100,0) 3(-200,0) 4(-300,0) 5(-400,0) 6(-500,0) 7(-600,0) 8(-700,0) 9(-800,0)
  silkscreen extent -850,-102 50,123
PCMC2-9#2 [mil]
  rect 70x118 hole 48: 1(0,0)
  oval 70x118 hole 48: 2(100,0) 3(200,0) 4(300,0) 5(400,0) 6(500,0) 7(600,0) 8(700,0) 9(800,0)
  silkscreen extent -51,-123 850,102
PCMC2-16 [mil]
  rect 70x118 hole 48: 1(0,0)
  oval 70x118 hole 48: 2(100,0) 3(200,0) 4(300,0) 5(400,0) 6(500,0) 7(600,0) 8(700,0) 9(800,0) 10(900,0) 11(1000,0) 12(1100,0) 13(1200,0) 14(1300,0) 15(1400,0) 16(1500,0)
  silkscreen extent -50,-122 1550,103
"PENTAWATT V" [mil]
  rect 98x98 hole 52: 1(0,0)
  round 98 hole 52: 2(-66,-145) 3(-133,0) 4(-200,-145) 5(-267,0)
  silkscreen extent -360,-320 80,-60
SMB/DO214AA-REV#1 [mil]
  rect 118x98 smd: 1(0,4) 2(0,-181)
  silkscreen extent -85,-290 111,54
SMB/DO214AA-REV#2 [mil]
  rect 98x118 smd: 1(3,0) 2(-182,0)
  silkscreen extent -291,-111 53,85
SMB/DO-214AA [mil]
  rect 104x68 smd: 1(-85,0) 2(84,0)
  silkscreen extent -95,-70 124,71
"SOIC 16 PINOS"#1 [mil]
  rect 30x86 smd: 1(-175,-95) 2(-125,-95) 3(-75,-95) 4(-25,-95) 5(25,-95) 6(75,-95) 7(125,-95) 8(175,-95) 9(175,125) 10(125,125) 11(75,125) 12(25,125) 13(-25,125) 14(-75,125) 15(-125,125) 16(-175,125)
  silkscreen extent -212,-99 197,70
"SOIC 16 PINOS"#2 [mil]
  rect 30x86 smd: 1(175,95) 2(125,95) 3(75,95) 4(25,95) 5(-25,95) 6(-75,95) 7(-125,95) 8(-175,95) 9(-175,-125) 10(-125,-125) 11(-75,-125) 12(-25,-125) 13(25,-125) 14(75,-125) 15(125,-125) 16(175,-125)
  silkscreen extent -196,-70 213,99
"SOIC 16 PINOS"#3 [mil]
  rect 30x86 smd: 1(175,94) 2(125,94) 3(75,94) 4(25,94) 5(-25,94) 6(-75,94) 7(-125,94) 8(-175,94) 9(-175,-126) 10(-125,-126) 11(-75,-126) 12(-25,-126) 13(25,-126) 14(75,-126) 15(125,-126) 16(175,-126)
  silkscreen extent -197,-70 212,98
"SOIC 20 FEITO A" [mil]
  rect 31x98 smd: 1(0,0) 2(50,0) 3(100,0) 4(150,0) 5(200,0) 6(250,0) 7(300,0) 8(350,0) 9(400,0) 10(450,0) 11(450,400) 12(400,400) 13(350,400) 14(300,400) 15(250,400) 16(200,400) 17(150,400) 18(100,400) 19(50,400) 20(0,400)
  silkscreen extent -49,69 473,335
"SOIC LARGO ATME" [mil]
  rect 31x78 smd: 1(0,0) 2(50,0) 3(100,0) 4(150,0) 5(150,300) 6(100,300) 7(50,300) 8(0,300)
  silkscreen extent -80,-20 200,240
SOIC-08 [mil]
  rect 30x82 smd: 1(0,0) 2(50,0) 3(100,0) 4(150,0) 5(150,250) 6(100,250) 7(50,250) 8(0,250)
  silkscreen extent -41,-2 180,195
"SOT23 - REVISAD"#1 [mil]
  rect 43x55 smd: 1(0,0) 2(-75,0) 3(-38,-102)
  silkscreen extent -99,-70 19,-43
"SOT23 - REVISAD"#2 [mil]
  rect 43x55 smd: 1(0,0) 2(74,0) 3(37,103)
  silkscreen extent -20,44 98,71
"SOT23 - REVISAD"#3 [mil]
  rect 55x43 smd: 1(0,0) 2(0,-75) 3(103,-38)
  silkscreen extent 44,-99 71,19
"SOT23 - REVISAD"#4 [mil]
  rect 43x55 smd: 1(0,0) 2(75,0) 3(38,102)
  silkscreen extent -19,43 99,70
SOT23-5 [mil]
  rect 43x23 smd: 1(0,0) 2(0,-38) 3(0,-75) 4(110,-75) 5(110,0)
  silkscreen extent -10,-95 75,46
"TO220-3 EM PÉ"#1 [mil]
  oval 70x137 hole 60: 1(0,0) 2(-100,0) 3(-200,0)
  silkscreen extent -300,-100 100,75
"TO220-3 EM PÉ"#2 [mil]
  oval 70x110 hole 60: 1(0,0) 2(-100,0) 3(-200,0)
  silkscreen extent -300,-100 100,75
TO-263_3 [mil]
  rect 60x110 smd: 1(-100,0) 2(0,0) 3(100,0)
  Top Layer, Top region: -212,120 211,120 211,610 -212,610
  Top Layer, Top lines w50: 0,-1 0,142
  silkscreen extent -225,60 225,462
"TRIMPOT 3386"#1 [mil]
  round 60 hole 32: 1(0,0) 2(-100,-200) 3(-200,0)
  silkscreen extent -250,-250 50,50
"TRIMPOT 3386"#2 [mil]
  round 60 hole 32: 1(0,0) 2(100,200) 3(200,0)
  silkscreen extent -50,-50 250,250
WH1602_WH1602(Primary) [mil]
  rect 78x118 hole 44: 1(0,0)
  oval 78x118 hole 44: 2(-100,0) 3(-200,0) 4(-300,0) 5(-400,0) 6(-500,0) 7(-600,0) 8(-700,0) 9(-800,0) 10(-900,0) 11(-1000,0) 12(-1100,0) 13(-1200,0) 14(-1300,0) 15(200,0) 16(100,0)
  round 10 smd far side: _1(-1545,59)
  round 124 hole 124: _2(1448,59) _3(1507,1476) A4(-1604,1476)
  silkscreen extent -1702,-99 1605,1633
XTAL_32768' [mil]
  round 62 hole 32: 1(0,-50) 2(0,50)
  Top Layer, Top region: -410,-60 -50,-60 -50,60 -410,60
  silkscreen extent -387,-63 -62,62
XTALV' [mil]
  round 62 smd far side: 1(95,0) 2(-95,0)
  Top Layer, Top lines w70: -62,-87 -12,-37 -12,38 -62,88 ; 63,-87 13,-37 13,38 63,88 ; -187,-37 -137,-87 138,-87 188,-37 188,38 138,88 -137,88 -187,38 -187,-37
  silkscreen extent -215,-90 215,90

## Part data
B1: library part "SUPORTE PILHA CR2032", "SUPORTE PILHA CR2032"
C1: library part 470uF/50V, "470uF/50V"
C2: library part 10uF/35V-tantalo-2413, "10uF/35V-tantalo-2413"
C3 C4 C5 C7 C12 C13 C14 C15 C16 C17 C18 C19 C20 C22 C23 C26 C27 C28 C29 C30 C31 C32 C33 C34 C35 C36 C39 C41 C42 C43 C44 C45 C46 C47 C48 C49 C50: library part 100nF/50-0805-NPO, "100nF/50-0805-NPO"
C8 C9 C10 C11: library part 22pF-0805-NPO, "22pF-0805-NPO"
C21: library part 10nF/50V-0805-NPO, "10nF/50V-0805-NPO"
C24 C25: library part 10uF/35V-tantalo, "10uF/35V-tantalo"
C37 C38 C40: library part 100uF/50V, "100uF/50V"
D2 D6 D7 D11: library part "ZENER 3V3-SOD80", "3V3-SOD80-1/2W"
D5: library part SMBJ5.0A, "SMBJ5.0A"
D20 D21: library part 1N5819, "1N5819"
J10: library part "DB-9 - FÊMEA 180º MONTAGEM EM PCI", "DBPCF-09"
J11: library part "IDC 10x2"
J12: library part "HEADER 10x2", "BARRA DE PINOS 10x2 VIAS"
J13: library part "BARRA DE PINOS", "BMO-02-2E"
J14: library part "BARRA DE PINOS"
J20: library part IDCSN, "CONECTOR HEADER 10 VIAS 90º"
L1: library part "LED VERDE 0603 SMD", "LED VERDE 0603 VERDE"
L2 L3 L4 L5: library part "LED VERMELHO 0603 SMD", "LED VERMELHO 0603 SMD"
LCD1: library part WH1602A, "WH1602A"
LCD2: library part WH2002, "WH2002"
M1: library part "HC-06 BLUETOOTH", "HC-06"
PSW1 PSW2 PSW3: library part "POLYSWITCH 200mA"
PSW1' PSW2' PSW3' R15 R16 R41 R64 R68 R72: library part 100K-0805-5%, "100K-0805-5%"
Q1: library part BC856L, "BC856L"
Q2 Q6 Q7 Q9: "BC846L"
R1 R62 R84: library part 1K-0805-5%, "1K-0805-5%"
R2 R4 R5 R6: library part 390R-2512-5%, "390R-2512-5%"
R11 R20 R21 R22 R24 R58: library part 10K-0805-5%, "10K-0805-5%"
R29 R36: library part "RES 5R6-CR100", "5R6-CR100"
R33: library part "TRIMPOT 3386 50K"
R35: library part "TRIMPOT 10K-3386", "TRIMPOT 100K-0805-5%"
R43 R53 R54 R55 R56 R57 R59 R91 R92 R93 R94 R95 R96: library part 4K7-1206-5%, "4K7-1206-5%"
R44 R45 R46 R47 R49 R50 R51 R52: library part "RES 10K-0805", "RES 10K-0805"
R76: library part 56K-0805-5%, "56K-0805-5%"
R77 R85 R86 R87 R88 R89 R90 R99 R100 R101 R102 R103 R104 R105: library part 10R-0805-5%, "10R-0805-5%"
R80: library part "RES 100K-0805", "100K-0805"
U3 U15: library part ULN2003, "ULN2003"
U4: library part LPC1768FDB100
U7: library part DS1819A, "DS1819A"
U9: library part LM3940IT-3.3-TO220, "LM3940IT-3.3-TO220"
U11 U12 U13: "OPTOACOPLADOR PC817 DIP-4"
X1: library part "CRISTAL 12MHZ", "12MHZ"
X2: library part "CRISTAL 32.768 Hz", "CRISTAL 32.768Hz"

## Free pads (board coordinates)
  round 3.505 hole 3.48: 0(4.978,4.978) 0(4.978,109.982) 0(174.981,4.978) 0(174.981,109.982)

## Via types
v1: diameter 0.762, hole 0.508, Top Layer, Top to Bottom Layer, Bottom, 489 vias
v2: diameter 0.864, hole 0.813, Top Layer, Top to Bottom Layer, Bottom, 2 vias

## Nets (pads, with @x,y where several pads share a name; then routed paths per layer and width w, separated by ;. In a path a pad name is that pad's centre, name@x,y a point inside that pad or via, vN(x,y) a via of type N, cw(c..) or ccw(c..) an arc to the next point about the centre after c; other vN are vias at no path point)
3,3V: C7.2 C12.2 C13.2 C14.2 C15.2 C16.2 C17.2 C18.2 C27.2 C31.2 C35.2 C40.1 C41.2 C46.2 C47.2 D3.2 D5.2 D20.1 J4.3 J6.3 J8.2 J12.1 J12.2 M1.12 R11.1 R13.2 R17.2 R18.2 R19.2 R25.1 R26.1 R27.1 R28.1 R37.2 R38.2 R39.2 R40.2 R41.2 R44.1 R45.1 R46.1 R47.1 R48.2 R62.1 R84.2 U2.10 U2.16 U4.10 U4.12 U4.28 U4.42 U4.54 U4.71 U4.84 U4.96 U6.16 U7.5 U8.3 U8.7 U8.8 U9.3 U10.3 U10.7 U10.8 U14.10 U14.16 | length 828.9
  Top Layer, Top w0.254: C12.2@91.161,40.869 U4.10@94.132,40.869 97.257,40.869 ; U4.12@94.132,39.878 97.155,39.878 ; C13.2@96.545,27.813 96.596,27.864 U4.28@96.596,31.902 96.596,34.366 97.536,35.306 ; C18.2@97.028,50.927 97.587,50.368 U4.96@97.587,46.863 97.587,43.231 ; C18.2@97.561,50.902 C18.2@97.587,50.724 ; C14.2@103.53,27.813 103.607,28.219 U4.42@103.607,31.902 103.607,35.306 103.607,35.331 ; 103.607,43.84 103.124,43.561 103.124,44.704 103.607,45.187 U4.84@103.607,46.863 103.607,50.648 C17.2@103.657,50.876 ; 105.461,43.383 U4.71@109.068,43.383 114.503,43.383 C16.2@114.376,43.358 ; 105.791,35.306 106.223,34.874 U4.54@109.068,34.874 113.589,34.874 114.427,34.036 114.427,33.655 R11.1@116.332,31.75 ; v1@141.986,34.29 v1(142.113,34.417)
  Top Layer, Top w0.356: D20.1@80.264,40.513 v1@81.661,40.513 ; v1@87.122,39.878 87.63,40.386 C12.2@90.424,40.386 ; C7.2@142.113,33.096 143.586,33.096 144.145,33.655 U2.16@144.145,34.925
  Top Layer, Top w0.508: R41.2@15.24,59.055 R41.2@15.316,59.055 v1@16.637,59.055 ; v1(16.637,59.182) v1@16.637,59.055 ; R84.2@16.815,78.74 17.78,78.74 19.05,77.47 v1@19.05,74.422 ; R17.2@17.78,59.055 v1@16.637,59.055 ; R13.2@19.05,73.33 v1@19.05,74.422 ; v1(19.177,74.422) v1@19.05,74.422 ; R48.2@71.374,91.059 71.374,89.408 71.501,89.281 C46.2@73.787,89.281 ; R48.2@71.501,91.186 72.136,91.186 72.771,91.821 72.771,95.504 D3.2@71.501,96.774 ; C46.2@73.533,89.662 v1(73.533,90.678) ; C46.2@74.549,89.662 v1@74.549,90.551 ; R45.1@81.28,70.104 v1(81.28,73.152) ; R46.1@83.82,69.85 v1(83.82,73.152) ; R47.1@86.36,69.85 v1(86.36,73.152) ; R37.2@106.553,17.653 v1(106.553,18.542) ; R38.2@109.347,17.653 v1(109.347,18.542) ; U14.10@109.855,76.81 109.855,74.295 109.601,74.041 108.204,74.041 107.823,73.66 107.823,72.39 108.077,72.136 v1(108.839,72.136) 108.839,71.12 109.22,70.739 R40.2@110.617,70.739 ; R39.2@113.411,70.739 114.808,70.739 115.189,71.247 v1(115.189,72.009) 118.745,72.009 119.507,72.771 119.507,76.581 ; U6.16@122.86,15.545 C27.2@124.46,15.545 ; C7.2@141.986,33.096 v1@141.986,34.29 ; v1(151.765,33.02) U2.10@151.765,34.925
  Top Layer, Top w0.61: R18.2@17.78,46.99 v1(18.923,46.99) R19.2@19.939,46.99 ; v1(21.971,74.422) v1@21.971,73.279 ; v1(22.098,73.279) v1@21.971,73.279 ; v1(24.003,59.182) 24.384,58.801 v1(24.384,46.99) ; v1@24.003,59.309 24.003,64.643 22.86,64.643 21.971,65.532 v1@21.971,73.279
  Top Layer, Top w0.762: R27.1@40.005,68.453 v1(40.005,73.152) ; C46.2@74.041,89.408 74.549,89.916 M1.12@76.708,89.916 ; J12.2@88.9,59.69 J12.1@88.9,62.23 88.9,65.024 91.186,67.31 ; 91.186,67.183 91.186,67.31 ; v1(91.186,73.279) 91.186,67.31 ; v1(99.06,72.136) v1(99.06,90.678) ; U14.16@117.475,76.962 118.11,76.962 119.507,78.359 119.507,76.327 ; C31.2@122.809,32.741 122.936,33.02 v1(122.936,33.909) ; C27.2@125.095,15.494 125.857,15.494 126.365,16.002 v1(126.365,16.129) ; v1(125.095,33.782) U10.8@125.095,35.56 125.095,34.163 125.476,33.782 126.365,33.782 U10.7@126.365,35.56 126.365,33.528 127.635,32.258 U10.3@127.635,29.21 ; C35.2@131.445,33.02 v1(131.445,35.052) ; U8.8@133.985,36.068 v1(133.985,34.417) 135.255,34.417 ; U8.7@135.255,35.941 135.255,34.417 ; U8.3@136.525,28.702 136.525,33.147 135.255,34.417 ; v1(165.354,33.655) 165.354,41.91 D5.2@167.005,43.561 ; v1(177.673,16.129) v1(177.673,21.209) 177.673,21.717 ; v1(177.673,22.098) v1@177.8,22.098 ; v1(177.673,23.114) v1@177.8,23.114
  Top Layer, Top w1.016: J8.2@3.81,44.45 1.778,44.45 1.143,45.085 1.143,67.31 ; J6.3@3.81,67.31 1.143,67.31 ; J4.3@3.81,85.09 2.159,85.09 1.143,84.074 1.143,67.31 ; R62.1@175.26,50.165 178.562,50.165 ; C41.2@175.997,21.717 175.997,23.647 174.625,25.019 174.498,25.4 177.165,25.4 ; 177.292,25.4 177.292,24.384 177.673,24.003 v1(177.673,23.114) v1(177.673,22.098) 177.673,21.717 v1@177.673,21.336
  Top Layer, Top w1.27: v1(22.098,73.279) 22.098,74.295 v1(22.098,85.09) ; v1(26.797,73.279) R25.1@26.797,74.295 ; v1(43.18,73.279) R26.1@43.18,74.295 ; 73.787,70.358 v1(73.787,73.279) ; v1@171.196,72.39 171.196,68.961 170.307,67.691 170.307,62.738 172.974,60.071 176.149,60.071 178.562,57.785 ; v1(171.323,72.263) v1(171.323,73.533) ; v1@177.8,21.336 177.8,22.098 177.8,23.114 177.8,24.257 178.562,25.019 v1(178.562,35.052) v1(178.562,36.068) v1(178.562,37.211) 178.562,50.165 178.562,57.658 ; 97.536,35.306 103.607,35.306 v1(104.14,35.306) v1(105.029,35.306) 105.664,35.306 105.664,43.434 97.536,43.434 97.536,35.306
  Bottom Layer, Bottom w0.356: v1(81.534,40.513) 82.423,39.624 85.852,39.624 86.106,39.878 v1@87.122,39.878
  Bottom Layer, Bottom w0.508: v1(151.765,33.02) 151.765,34.925
  Bottom Layer, Bottom w0.61: v1(16.637,59.182) v1(24.003,59.182) ; v1(18.923,46.99) v1(24.384,46.99) ; v1(19.177,74.422) v1(21.971,74.422)
  Bottom Layer, Bottom w0.762: v1(40.005,73.152) v1@40.005,73.279 ; v1(73.533,90.678) v1(74.549,90.678) v1(99.06,90.678) ; v1(81.28,73.152) v1@81.28,73.279 ; v1(83.82,73.152) v1@83.82,73.279 ; v1(86.36,73.152) v1@86.36,73.279 ; v1(99.06,72.136) v1@99.06,72.263 ; v1(106.553,18.542) v1(109.347,18.542) ; v1(108.839,72.136) v1@108.839,72.263 ; v1@109.22,18.415 109.22,17.78 110.871,16.129 v1(126.365,16.129) v1(177.673,16.129) ; v1(115.189,72.009) v1@115.189,72.263 ; v1(122.936,33.909) 123.063,33.782 v1(125.095,33.782) 125.095,34.417 ; 133.35,35.052 v1(133.985,34.417) ; v1(165.354,33.655) v1@165.354,34.925
  Bottom Layer, Bottom w1.016: v1(104.14,35.306) v1(105.029,35.306) ; v1@105.029,35.179 105.664,34.544 122.936,34.544 123.444,35.052 v1(131.445,35.052) 133.35,35.052 v1(165.354,35.052) v1(178.562,35.052) ; 177.546,23.876 178.562,24.892 v1@178.562,34.925 ; v1@177.673,21.336 v1(177.673,22.098) ; v1@178.562,35.179 v1(178.562,36.068) v1(178.562,37.211)
  Bottom Layer, Bottom w1.27: J4.3@3.937,85.09 v1(22.098,85.09) ; v1(22.098,73.279) v1(26.797,73.279) 40.005,73.279 v1(43.18,73.279) v1(73.787,73.279) 81.28,73.279 83.82,73.279 86.36,73.279 90.678,73.279 91.694,72.263 99.06,72.263 108.839,72.263 115.189,72.263 v1(171.323,72.263) ; C40.1@161.29,21.59 161.29,22.987 162.179,23.876 177.673,23.876 177.673,23.368 v1(177.673,23.114) v1(177.673,22.098) 177.673,21.59 ; v1@171.323,72.136 v1(171.323,72.263) ; v1(171.323,73.533) v1(171.323,72.263)
  other v1: 87.122,39.827
5V: C23.2 C24.1 C25.1 C38.1 C39.2 D4.2 J9.2 J11.1 J11.2 J11.3 J11.4 J11.5 J11.6 J16.3 LCD1.2 LCD2.2 R29.1 R33.1 R35.1 R36.2 R43.2 R53.2 R54.2 R55.2 R56.2 R57.2 R75.2 R79.2 U5.1 U5.20 U9.1 | length 567.5
  Top Layer, Top w0.254: 135.89,55.753 LCD1.2@135.89,63.5
  Top Layer, Top w0.356: v1(56.642,23.114) 56.642,22.098 R57.2@57.15,21.59 ; v1(59.69,23.114) 59.69,22.098 R43.2@60.198,21.59 ; v1(62.992,23.114) 62.992,21.844 R56.2@63.246,21.59 ; v1(66.294,23.114) 66.294,22.098 R53.2@66.802,21.59 ; v1(69.342,23.114) 69.342,22.098 R54.2@69.85,21.59 ; R55.2@72.644,21.59 v1@72.644,23.114
  Top Layer, Top w0.508: R79.2@39.675,20.625 40.31,20.625 41.58,21.895 v1(41.58,23.495)
  Top Layer, Top w0.762: R35.1@96.393,106.807 96.393,112.649 97.79,113.97 131.14,113.97 131.775,113.97 133.35,112.395 133.35,111.76 J9.2@133.35,110.49 ; R35.1@96.52,107.188 98.679,107.188 107.188,98.679 107.188,96.647 107.315,96.139 107.061,96.647 LCD2.2@107.315,96.647 ; v1(107.188,76.2) LCD2.2@107.188,96.393 ; v1(135.89,40.132) LCD1.2@135.89,62.357 ; C24.1@149.86,90.17 v1(149.86,94.742) ; C23.2@153.162,95.885 v1(153.162,94.742) 153.162,93.599 153.67,93.091 v1(153.67,76.2) ; v1@161.29,40.132 v1(161.417,40.132) ; v1(167.513,25.527) v1@167.513,25.654
  Top Layer, Top w1.016: R36.2@168.91,97.536 v1(168.91,76.2) 168.91,75.946 168.402,75.438 168.402,62.357 R33.1@172.466,58.293
  Top Layer, Top w1.27: LCD1.2@135.89,64.008 135.89,66.675 139.827,70.612 v1(139.827,76.327) R29.1@139.827,83.82 ; C25.1@161.29,33.02 161.29,40.132 v1(161.29,48.387) v1(161.29,49.53) ; C25.1@162.179,32.766 164.465,30.48 164.465,27.432 166.243,25.654 167.513,25.654 U9.1@168.91,25.654 ; J16.3@162.56,2.794 162.56,1.905 163.449,1.016 169.418,1.016 169.799,1.397 169.799,7.62 173.355,11.176 D4.2@173.355,13.081 ; J16.3@162.56,3.81 162.56,6.604 165.227,9.271 165.227,16.51 169.545,20.828 169.545,23.622 169.164,24.003 U9.1@169.164,25.4 ; v1(172.72,49.53) v1(172.72,50.673) R33.1@172.72,58.293
  Bottom Layer, Bottom w0.61: v1@41.529,23.495 41.91,23.114 v1(56.642,23.114) ; 72.644,22.098 95.123,22.098 96.139,23.114 159.258,23.114 161.417,25.273 166.37,25.273 v1(166.624,25.527) ; v1@166.497,25.527 v1(167.513,25.527)
  Bottom Layer, Bottom w0.762: v1(56.642,23.114) 56.642,22.098 72.644,22.098 ; 59.69,22.098 v1(59.69,23.114) ; 62.992,22.098 v1(62.992,23.114) ; 66.294,22.098 v1(66.294,23.114) ; 69.342,22.098 v1(69.342,23.114) ; 72.39,22.098 v1(72.39,23.114) ; 119.507,76.2 119.507,76.327 ; v1(135.89,40.132) 142.113,40.132 144.145,40.132 151.765,40.132 v1(161.417,40.132) ; v1@139.827,76.2 v1(139.827,76.327) ; v1(149.86,94.742) v1(153.162,94.742)
  Bottom Layer, Bottom w1.016: J11.6@83.82,76.2 J11.4@86.36,76.2 J11.2@88.9,76.2 v1(107.188,76.2) 119.507,76.2 139.827,76.2 v1(153.67,76.2) v1(168.91,76.2) ; J11.5@83.82,78.74 J11.1@89.154,78.74 ; J11.2@89.027,76.327 J11.1@89.027,78.74
  Bottom Layer, Bottom w1.27: v1(161.29,48.387) v1(161.29,49.53) v1(172.72,49.53) ; v1@172.72,49.657 v1(172.72,50.673)
12V: C37.1 J2.9 J15.4 J16.4 J16.5 J18.3 J19.5 J20.2 J21.1 J22.5 J23.1 Q1.2 R42.2 | length 353.3
  Top Layer, Top w0.762: v1(45.72,90.17) 45.593,90.043 45.466,89.916 45.466,24.765 45.72,24.511 45.72,20.066 48.006,17.907 Q1.2@48.006,16.383 ; v1(47.498,10.033) 47.498,16.002 Q1.2@48.133,16.637 ; J21.1@60.96,110.236 60.96,109.093 62.23,107.823 v1(62.23,90.17)
  Top Layer, Top w1.27: J18.3@30.353,4.445 30.353,1.27 39.37,1.27 ; J19.5@39.37,3.556 39.37,1.27 ; 55.118,1.524 55.118,5.969 55.499,6.35 J20.2@57.15,6.35 ; C37.1@156.21,13.97 156.21,10.16 157.48,8.89 J16.5@157.48,3.785 157.48,1.27 ; J16.4@160.02,3.785 160.02,1.778 159.512,1.27 157.48,1.27 ; 39.37,1.27 74.803,1.27 74.905,1.372 74.905,3.785 74.828,3.023 74.828,1.295 86.335,1.295 86.335,3.785 86.385,3.404 86.385,1.295 133.325,1.295 J2.9@133.325,3.785 133.35,1.27 157.48,1.27
  Bottom Layer, Bottom w0.762: v1(45.72,90.17) v1(62.23,90.17) ; v1(47.498,10.033) 51.054,10.033 54.991,6.096 J20.2@56.896,6.096 ; J21.1@60.96,110.49 60.96,106.553 62.357,105.156 91.186,105.156 96.52,110.49 J23.1@105.41,110.49
AUDIO: R1.1 U4.6 | length 101.4
  Top Layer, Top w0.254: R1.1@29.21,14.275 29.21,14.986 29.21,14.351 29.21,15.621 28.829,16.002 28.829,24.13 28.575,24.384 28.575,29.083 30.48,30.988 30.48,36.703 30.988,37.211 30.988,39.878 30.861,40.005 v1(30.861,42.926) ; U4.6@94.132,42.875 95.555,42.875 96.139,42.291 v1(96.139,42.164)
  Top Layer, Top w0.356: R1.1@29.21,14.275 R1.1@29.21,14.351
  Bottom Layer, Bottom w0.254: v1(30.861,42.926) 32.004,42.926 ; 31.877,42.926 32.512,42.926 32.766,42.672 69.977,42.672 71.501,41.275 76.454,41.275 78.613,43.434 85.344,43.434 85.598,43.688 90.17,43.688 91.694,42.164 v1(96.139,42.164)
BT_RXD: M1.2 U4.48 | length 190.2
  Top Layer, Top w0.254: v1(59.436,104.013) 58.674,103.251 58.674,91.821 59.309,91.186 59.309,65.532 60.071,64.77 v1(60.071,56.769) ; v1(72.898,104.013) 73.914,104.013 74.803,104.902 76.708,104.902 M1.2@76.86,104.927 ; U4.48@106.604,31.902 106.604,29.159 v1(107.061,28.702) ; v1(129.921,32.512) 129.921,33.147 130.556,33.782 130.556,44.196 131.826,45.466 v1(131.826,54.991)
  Bottom Layer, Bottom w0.254: v1(59.436,104.013) v1(72.898,104.013) ; v1(60.071,56.769) 60.833,56.007 94.615,56.007 95.504,56.896 102.235,56.896 104.14,54.991 v1(131.826,54.991) ; v1(107.061,28.702) 108.458,28.702 109.728,29.972 118.237,30.226 121.285,30.226 123.19,32.131 126.492,32.131 126.873,32.512 v1(129.921,32.512)
BT_TXD: M1.1 U4.49 | length 166.8
  Top Layer, Top w0.254: v1(63.373,85.217) 63.373,92.202 63.119,92.456 63.119,105.283 v1(64.643,106.807) ; v1(74.295,106.68) 74.93,106.68 75.184,106.426 M1.1@76.835,106.426 ; M1.1@76.86,106.426 M1.1@77.216,106.299 ; v1(93.218,83.82) 93.218,58.039 93.599,57.658 v1(93.599,57.404) ; U4.49@107.086,31.902 107.086,30.328 v1(107.569,29.845) ; v1(120.904,31.242) 121.539,31.877 121.539,36.322 123.952,38.735 123.952,57.023 v1(124.333,57.404)
  Bottom Layer, Bottom w0.254: v1(63.373,85.217) 63.627,85.217 63.881,84.963 75.184,84.963 76.327,83.82 v1(93.218,83.82) ; v1(64.643,106.807) 74.168,106.807 v1(74.295,106.68) ; v1(93.599,57.404) 93.853,57.658 122.555,57.658 122.809,57.404 v1(124.333,57.404) ; v1(107.569,29.845) 108.331,29.845 109.601,31.115 120.904,31.115 v1(120.904,31.242)
CEL_RXD: R97.2 R98.1 U4.74 | length 157.5
  Top Layer, Top w0.254: R98.1@63.5,67.818 63.5,67.437 63.5,66.675 64.516,65.659 64.516,57.785 65.405,56.896 v1(65.405,47.244) ; U4.74@109.068,44.882 110.795,44.882 v1(111.125,45.212) ; R97.2@112.065,17.551 v1(112.065,18.618) ; v1(139.954,19.304) 140.462,19.812 140.462,34.163 141.097,34.798 v1(141.097,46.101)
  Bottom Layer, Bottom w0.254: v1(65.405,47.244) 65.659,47.371 100.33,47.371 101.092,46.609 106.045,46.609 107.95,44.958 110.871,44.958 v1(111.125,45.212) 111.506,44.831 118.237,44.831 119.507,46.101 v1(141.097,46.101) ; v1(112.065,18.618) 139.268,18.618 v1(139.954,19.304)
CEL_TXD: J11.17 J11.18 U4.75 U6.10 | length 172.5
  Top Layer, Top w0.254: v1(63.5,50.673) 63.881,51.054 63.881,64.516 61.976,66.421 61.976,77.216 65.151,80.391 67.818,80.391 68.58,79.629 68.58,76.454 J11.18@68.58,76.2 ; U4.75@109.068,45.39 109.525,45.39 109.728,45.593 109.728,49.911 v1(110.363,50.546) ; v1(115.189,12.827) 115.189,14.859 U6.10@115.24,15.875 ; v1(129.794,50.546) 129.794,34.163 129.159,33.528 129.159,31.75 129.769,31.14 129.769,28.6 131.064,27.305 v1(131.064,12.827)
  Top Layer, Top w0.457: J11.18@68.58,76.2 68.58,77.978 J11.17@68.58,78.74
  Bottom Layer, Bottom w0.254: v1(63.5,50.673) 63.754,50.927 99.314,50.927 100.457,49.784 102.362,49.784 102.997,50.419 110.236,50.419 v1(110.363,50.546) v1(129.794,50.546) ; v1(115.189,12.827) v1(131.064,12.827)